# Altium PCB Multislope_Board.PcbDoc (part 2 of 2)
Units mil, origin at the board's own origin, x right, y up, seen from the top; angles counter-clockwise.
Board outline 6000 x 4000 mil, 2 copper layers (Top Layer, Bottom Layer); 93 components, 65 nets, 831 pads, 5 vias.
Unrouted connection lines stored in the file: 171.
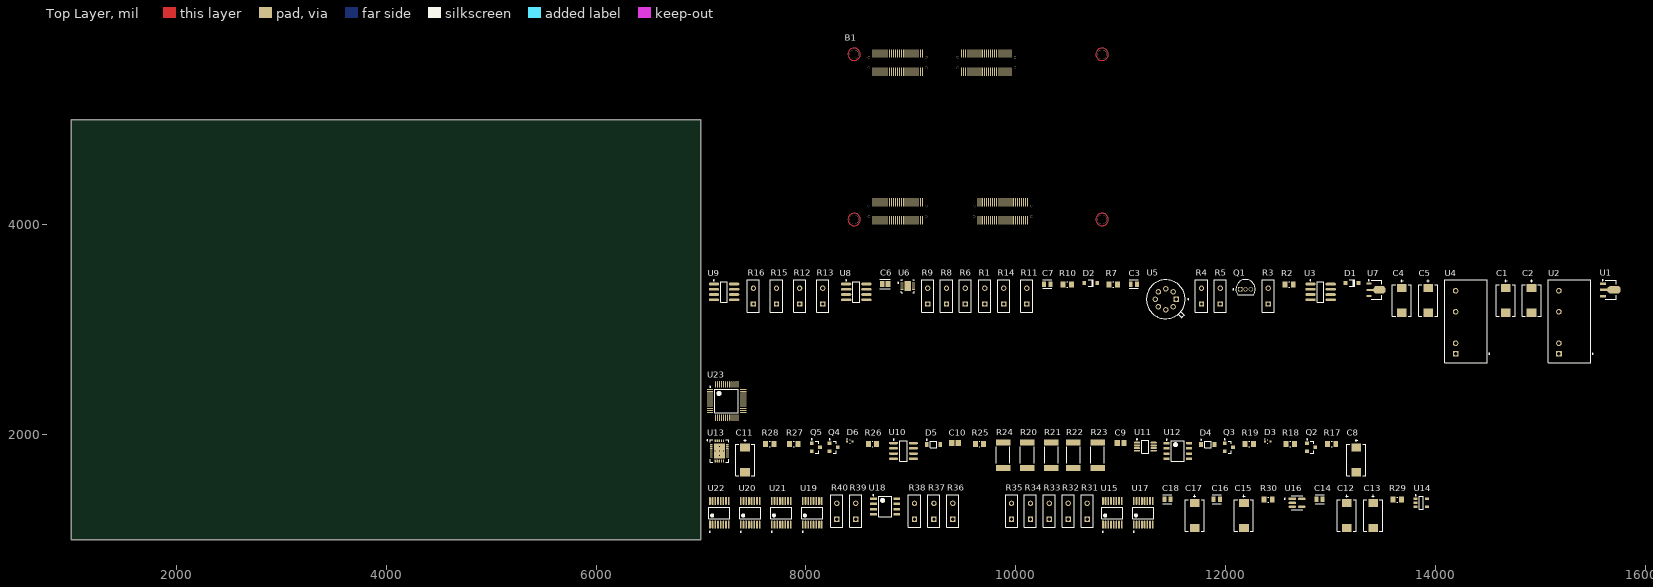
[diagram p0: Top Layer view]

## Via types
v1: diameter 19.68, hole 7.87, Top Layer to Bottom Layer, 5 vias

## Nets (pads, with @x,y where several pads share a name; then routed paths per layer and width w, separated by ;. In a path a pad name is that pad's centre, name@x,y a point inside that pad or via, vN(x,y) a via of type N, cw(c..) or ccw(c..) an arc to the next point about the centre after c; other vN are vias at no path point) (continued)
pads on no net: B1.AB_1 B1.AB_2 B1.AB_3 B1.AB_4 B1.AB_5 B1.AB_6 B1.AB_7 B1.AB_8 B1.AB_9 B1.AB_10 B1.AB_11 B1.AB_12 B1.AB_13 B1.AB_14 B1.AB_15 B1.AB_16 B1.AB_17 B1.AB_18 B1.AB_19 B1.AB_20 B1.AB_21 B1.AB_22 B1.AB_23 B1.AB_24 B1.AB_25 B1.AB_26 B1.AB_27 B1.AB_28 B1.AB_29 B1.AB_30 B1.AB_31 B1.AB_32 B1.AB_33 B1.AB_34 B1.AB_35 B1.AB_36 B1.AB_37 B1.AB_38 B1.AB_39 B1.AB_40 B1.AB_41 B1.AB_42 B1.AB_43 B1.AB_44 B1.AB_45 B1.AB_46 B1.AB_47 B1.AB_48 B1.AB_49 B1.AB_50 B1.AT_1 B1.AT_2 B1.AT_3 B1.AT_4 B1.AT_5 B1.AT_6 B1.AT_7 B1.AT_8 B1.AT_9 B1.AT_10 B1.AT_11 B1.AT_12 B1.AT_13 B1.AT_14 B1.AT_15 B1.AT_16 B1.AT_17 B1.AT_18 B1.AT_19 B1.AT_20 B1.AT_21 B1.AT_22 B1.AT_23 B1.AT_24 B1.AT_25 B1.AT_26 B1.AT_27 B1.AT_28 B1.AT_29 B1.AT_30 B1.AT_31 B1.AT_32 B1.AT_33 B1.AT_34 B1.AT_35 B1.AT_36 B1.AT_37 B1.AT_38 B1.AT_39 B1.AT_40 B1.AT_41 B1.AT_42 B1.AT_43 B1.AT_44 B1.AT_45 B1.AT_46 B1.AT_47 B1.AT_48 B1.AT_49 B1.AT_50 B1.BB_1 B1.BB_2 B1.BB_3 B1.BB_4 B1.BB_5 B1.BB_6 B1.BB_7 B1.BB_8 B1.BB_9 B1.BB_10 B1.BB_11 B1.BB_12 B1.BB_13 B1.BB_14 B1.BB_15 B1.BB_16 B1.BB_17 B1.BB_18 B1.BB_19 B1.BB_20 B1.BB_21 B1.BB_22 B1.BB_23 B1.BB_24 B1.BB_25 B1.BB_26 B1.BB_27 B1.BB_28 B1.BB_29 B1.BB_30 B1.BB_31 B1.BB_32 B1.BB_33 B1.BB_34 B1.BB_35 B1.BB_36 B1.BB_37 B1.BB_38 B1.BB_39 B1.BB_40 B1.BB_41 B1.BB_42 B1.BB_43 B1.BB_44 B1.BB_45 B1.BB_46 B1.BB_47 B1.BB_48 B1.BB_49 B1.BB_50 B1.BT_1 B1.BT_2 B1.BT_3 B1.BT_4 B1.BT_5 B1.BT_6 B1.BT_7 B1.BT_8 B1.BT_9 B1.BT_10 B1.BT_11 B1.BT_12 B1.BT_13 B1.BT_14 B1.BT_15 B1.BT_16 B1.BT_17 B1.BT_18 B1.BT_19 B1.BT_20 B1.BT_21 B1.BT_22 B1.BT_23 B1.BT_24 B1.BT_25 B1.BT_26 B1.BT_27 B1.BT_28 B1.BT_29 B1.BT_30 B1.BT_31 B1.BT_32 B1.BT_33 B1.BT_34 B1.BT_35 B1.BT_36 B1.BT_37 B1.BT_38 B1.BT_39 B1.BT_40 B1.BT_41 B1.BT_42 B1.BT_43 B1.BT_44 B1.BT_45 B1.BT_46 B1.BT_47 B1.BT_48 B1.BT_49 B1.BT_50 B1.CB_1 B1.CB_2 B1.CB_3 B1.CB_4 B1.CB_5 B1.CB_6 B1.CB_7 B1.CB_8 B1.CB_9 B1.CB_10 B1.CB_11 B1.CB_12 B1.CB_13 B1.CB_14 B1.CB_15 B1.CB_16 B1.CB_17 B1.CB_18 B1.CB_19 B1.CB_20 B1.CB_21 B1.CB_22 B1.CB_23 B1.CB_24 B1.CB_25 B1.CB_26 B1.CB_27 B1.CB_28 B1.CB_29 B1.CB_30 B1.CB_31 B1.CB_32 B1.CB_33 B1.CB_34 B1.CB_35 B1.CB_36 B1.CB_37 B1.CB_38 B1.CB_39 B1.CB_40 B1.CB_41 B1.CB_42 B1.CB_43 B1.CB_44 B1.CB_45 B1.CB_46 B1.CB_47 B1.CB_48 B1.CB_49 B1.CB_50 B1.CT_1 B1.CT_2 B1.CT_3 B1.CT_4 B1.CT_5 B1.CT_6 B1.CT_7 B1.CT_8 B1.CT_9 B1.CT_10 B1.CT_11 B1.CT_12 B1.CT_13 B1.CT_14 B1.CT_15 B1.CT_16 B1.CT_17 B1.CT_18 B1.CT_19 B1.CT_20 B1.CT_21 B1.CT_22 B1.CT_23 B1.CT_24 B1.CT_25 B1.CT_26 B1.CT_27 B1.CT_28 B1.CT_29 B1.CT_30 B1.CT_31 B1.CT_32 B1.CT_33 B1.CT_34 B1.CT_35 B1.CT_36 B1.CT_37 B1.CT_38 B1.CT_39 B1.CT_40 B1.CT_41 B1.CT_42 B1.CT_43 B1.CT_44 B1.CT_45 B1.CT_46 B1.CT_47 B1.CT_48 B1.CT_49 B1.CT_50 B1.DB_1 B1.DB_2 B1.DB_3 B1.DB_4 B1.DB_5 B1.DB_6 B1.DB_7 B1.DB_8 B1.DB_9 B1.DB_10 B1.DB_11 B1.DB_12 B1.DB_13 B1.DB_14 B1.DB_15 B1.DB_16 B1.DB_17 B1.DB_18 B1.DB_19 B1.DB_20 B1.DB_21 B1.DB_22 B1.DB_23 B1.DB_24 B1.DB_25 B1.DB_26 B1.DB_27 B1.DB_28 B1.DB_29 B1.DB_30 B1.DB_31 B1.DB_32 B1.DB_33 B1.DB_34 B1.DB_35 B1.DB_36 B1.DB_37 B1.DB_38 B1.DB_39 B1.DB_40 B1.DB_41 B1.DB_42 B1.DB_43 B1.DB_44 B1.DB_45 B1.DB_46 B1.DB_47 B1.DB_48 B1.DB_49 B1.DB_50 B1.DT_1 B1.DT_2 B1.DT_3 B1.DT_4 B1.DT_5 B1.DT_6 B1.DT_7 B1.DT_8 B1.DT_9 B1.DT_10 B1.DT_11 B1.DT_12 B1.DT_13 B1.DT_14 B1.DT_15 B1.DT_16 B1.DT_17 B1.DT_18 B1.DT_19 B1.DT_20 B1.DT_21 B1.DT_22 B1.DT_23 B1.DT_24 B1.DT_25 B1.DT_26 B1.DT_27 B1.DT_28 B1.DT_29 B1.DT_30 B1.DT_31 B1.DT_32 B1.DT_33 B1.DT_34 B1.DT_35 B1.DT_36 B1.DT_37 B1.DT_38 B1.DT_39 B1.DT_40 B1.DT_41 B1.DT_42 B1.DT_43 B1.DT_44 B1.DT_45 B1.DT_46 B1.DT_47 B1.DT_48 B1.DT_49 B1.DT_50 B1.MH1 B1.MH2 B1.MH3 B1.MH4 B1.MH5 B1.MH6 B1.MH7 B1.MH8 B1.MH9 B1.MH10 B1.MH11 B1.MH12 B1.MH13 B1.MH14 B1.MH15 B1.MH16 B1.MH17 B1.MH18 B1.MH19 B1.MH20 U6.1 U6.5 U6.8 U8.1 U8.5 U8.8 U9.1 U9.5 U9.8 U11.1 U11.5 U11.8 U12.1 U12.5 U12.8 U13.1 U13.2 U13.3 U13.4 U13.5 U13.6 U13.7 U13.8 U13.9 U13.10 U13.11 U13.12 U13.13 U13.14 U13.15 U13.16 U13.17 U13.18 U13.19 U13.20 U13.21 U13.22 U13.23 U13.24 U13.25 U14.4 U15.4 U15.6 U15.7 U15.8 U15.9 U15.10 U15.11 U15.14 U15.15 U15.16 U16.4 U17.4 U17.6 U17.7 U17.8 U17.9 U17.10 U17.11 U17.14 U17.15 U17.16 U18.1 U18.2 U18.3 U18.4 U18.5 U18.6 U18.7 U18.8 U19.1 U19.2 U19.3 U19.4 U19.5 U19.6 U19.7 U19.8 U19.9 U19.10 U19.11 U19.12 U19.13 U19.14 U19.15 U19.16 U20.1 U20.2 U20.4 U20.6 U20.7 U20.8 U20.9 U20.10 U20.11 U20.12 U20.13 U20.14 U20.15 U20.16 U21.4 U21.6 U21.7 U21.8 U21.9 U21.10 U21.11 U21.14 U21.15 U21.16 U22.1 U22.2 U22.3 U22.4 U22.5 U22.6 U22.7 U22.8 U22.9 U22.10 U22.11 U22.12 U22.13 U22.14 U22.15 U22.16 U23.1 U23.2 U23.3 U23.4 U23.5 U23.6 U23.7 U23.8 U23.9 U23.10 U23.11 U23.12 U23.13 U23.14 U23.15 U23.16 U23.17 U23.18 U23.19 U23.20 U23.21 U23.22 U23.23 U23.24 U23.25 U23.26 U23.27 U23.28 U23.29 U23.30 U23.31 U23.32 U23.33 U23.34 U23.35 U23.36 U23.37 U23.38 U23.39 U23.40 U23.41 U23.42 U23.43 U23.44 U23.45 U23.46 U23.47 U23.48
copper on no net:
  other v1: 7175,1801.69 7135.63,1845 7175,1845 7214.37,1845 7175,1888.31